# EAGLE board atxmega16d4.panel (EAGLE 7.3.0)
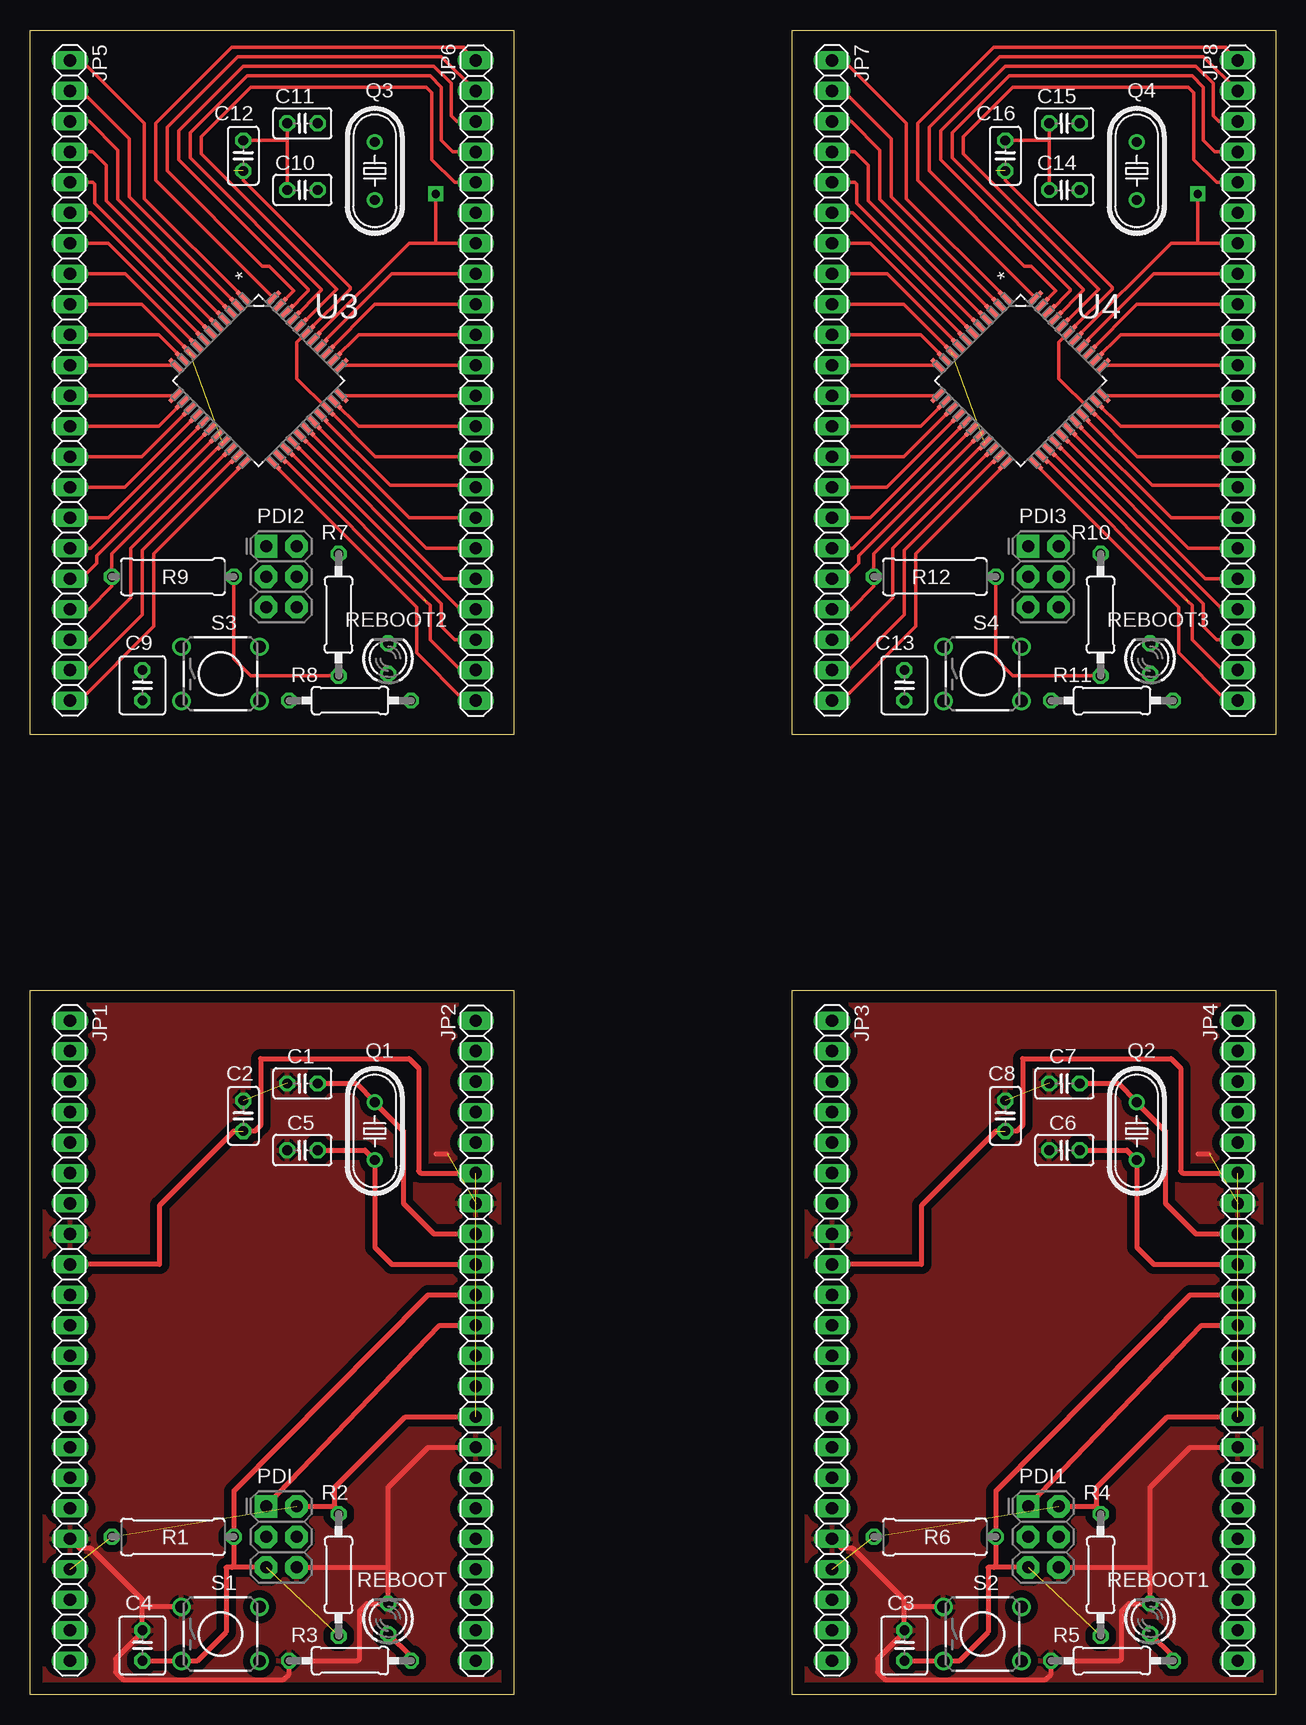
[diagram p0: board, top side]
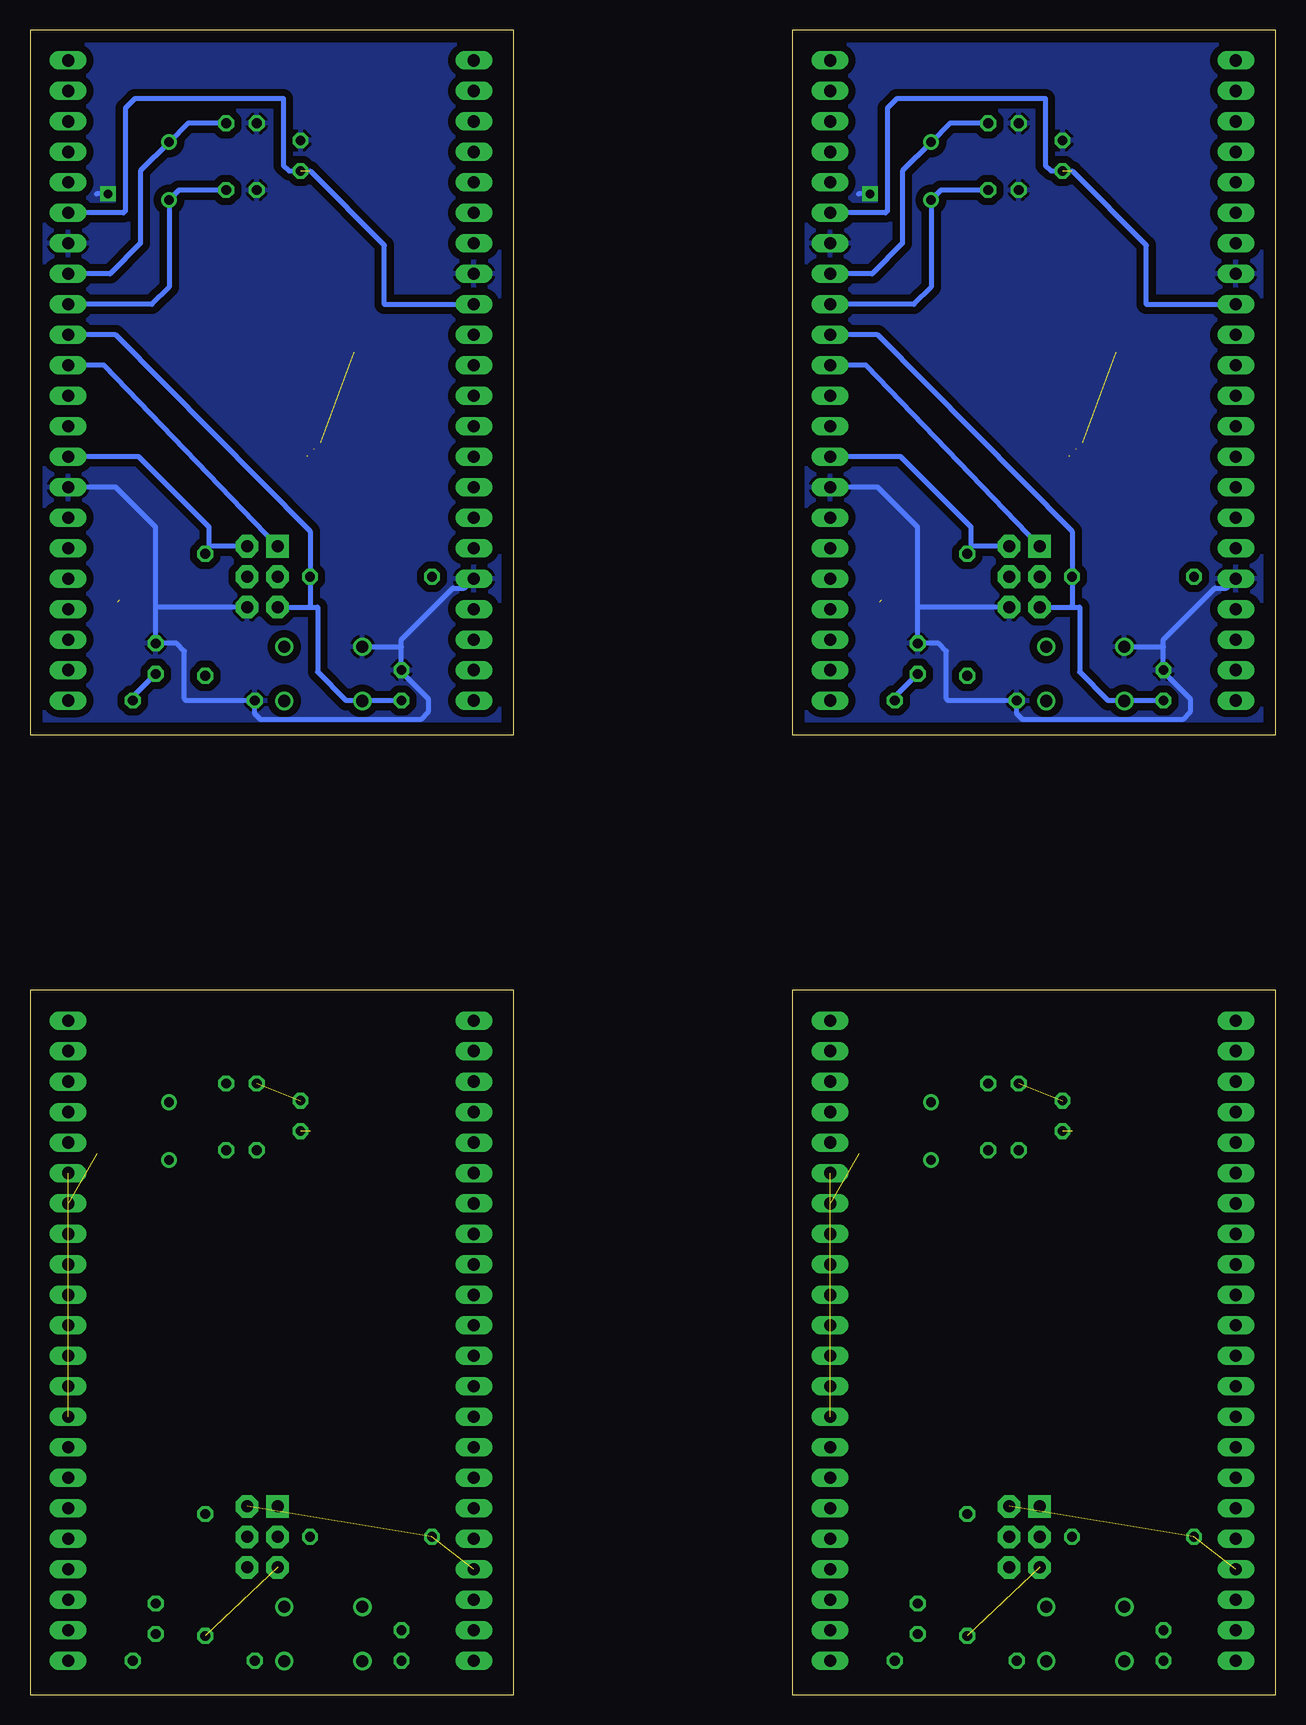
[diagram p1: board, bottom side, seen from below]

Size 103.82 x 138.75 mm. Coordinates in mm from the lower left corner, seen from the top.
Outline: 0,58.74 40.32,58.74 40.32,0 0,0 0,58.74
Outline: 63.5,58.74 103.82,58.74 103.82,0 63.5,0 63.5,58.74
Outline: 0,138.75 40.32,138.75 40.32,80.01 0,80.01 0,138.75
Outline: 63.5,138.75 103.82,138.75 103.82,80.01 63.5,80.01 63.5,138.75
Copper layers (1*16): Top 0.035mm / dielectric 1.5mm / Bottom 0.035mm
Design rules "default": minimum track width 10mil, minimum drill 24mil, track to track 8mil, track to pad 8mil, pad to pad 8mil, via to via 8mil, smd to smd 8mil, copper to edge 40mil, drill to drill 8mil, minimum pad ring 10mil, minimum via ring 8mil, stop-mask expansion 4mil, vias tented up to drill 0mil, thermal gap 10mil

## Footprints (pad centres in the part's own frame; a part is rotated, then mirrored left to right if it is on the bottom)
C025-025X050 = drill 0.813 octagon: 1 -1.27,0; 2 1.27,0
C025-040X050 = drill 0.813 octagon: 1 -1.27,0; 2 1.27,0
1X22 = drill 1.016 long: 1 -26.67,0; 2 -24.13,0; 3 -21.59,0; 4 -19.05,0; 5 -16.51,0; 6 -13.97,0; 7 -11.43,0; 8 -8.89,0; 9 -6.35,0; 10 -3.81,0; 11 -1.27,0; 12 1.27,0; 13 3.81,0; 14 6.35,0; 15 8.89,0; 16 11.43,0; 17 13.97,0; 18 16.51,0; 19 19.05,0; 20 21.59,0; 21 24.13,0; 22 26.67,0
2X3-NS = drill 1.016 pad 1.88 square: 1 -2.54,-1.27 | drill 1.016 pad 1.88 octagon: 2 -2.54,1.27; 3 0,-1.27; 4 0,1.27; 5 2.54,-1.27; 6 2.54,1.27
HC49U-V = drill 0.813: 1 -2.413,0; 2 2.413,0
0309/10 = drill 0.813 octagon: 1 -5.08,0; 2 5.08,0
0207/10 = drill 0.813 octagon: 1 -5.08,0; 2 5.08,0
LED3MM = drill 0.813 octagon: A -1.27,0; K 1.27,0
TACTILE-PTH = drill 1.016: 1 -3.251,2.261; 2 3.251,2.261; 3 -3.251,-2.261; 4 3.251,-2.261
QFP80P1200X1200X120-44N = smd 1.473 x 0.356: 1 -5.74,3.988; 2 -5.74,3.2; 3 -5.74,2.388; 4 -5.74,1.6; 5 -5.74,0.787; 6 -5.74,0; 7 -5.74,-0.787; 8 -5.74,-1.6; 9 -5.74,-2.388; 10 -5.74,-3.2; 11 -5.74,-3.988; 23 5.74,-3.988; 24 5.74,-3.2; 25 5.74,-2.388; 26 5.74,-1.6; 27 5.74,-0.787; 28 5.74,0; 29 5.74,0.787; 30 5.74,1.6; 31 5.74,2.388; 32 5.74,3.2; 33 5.74,3.988 | smd 0.356 x 1.473: 12 -3.988,-5.74; 13 -3.2,-5.74; 14 -2.388,-5.74; 15 -1.6,-5.74; 16 -0.787,-5.74; 17 0,-5.74; 18 0.787,-5.74; 19 1.6,-5.74; 20 2.388,-5.74; 21 3.2,-5.74; 22 3.988,-5.74; 34 3.988,5.74; 35 3.2,5.74; 36 2.388,5.74; 37 1.6,5.74; 38 0.787,5.74; 39 0,5.74; 40 -0.787,5.74; 41 -1.6,5.74; 42 -2.388,5.74; 43 -3.2,5.74; 44 -3.988,5.74

## Placement (x,y rotation side)
C1  [C025-025X050]  22.7,50.96 180 top
C2  [C025-025X050]  17.78,48.26 90 top
C3  [C025-040X050]  72.87,4.13 90 top
C4  [C025-040X050]  9.37,4.13 90 top
C5  [C025-025X050]  22.7,45.4 180 top
C6  [C025-025X050]  86.2,45.4 180 top
C7  [C025-025X050]  86.2,50.96 180 top
C8  [C025-025X050]  81.28,48.26 90 top
C9  [C025-040X050]  9.37,84.14 90 top
C10  [C025-025X050]  22.7,125.41 180 top
C11  [C025-025X050]  22.7,130.97 180 top
C12  [C025-025X050]  17.78,128.27 90 top
C13  [C025-040X050]  72.87,84.14 90 top
C14  [C025-025X050]  86.2,125.41 180 top
C15  [C025-025X050]  86.2,130.97 180 top
C16  [C025-025X050]  81.28,128.27 90 top
JP1  [1X22]  3.33,29.53 270 top
JP2  [1X22]  37.15,29.53 90 top
JP3  [1X22]  66.83,29.53 270 top
JP4  [1X22]  100.65,29.53 90 top
JP5  [1X22]  3.33,109.54 270 top
JP6  [1X22]  37.15,109.54 90 top
JP7  [1X22]  66.83,109.54 270 top
JP8  [1X22]  100.65,109.54 90 top
PDI  [2X3-NS]  20.95,13.18 270 top
PDI1  [2X3-NS]  84.45,13.18 270 top
PDI2  [2X3-NS]  20.95,93.19 270 top
PDI3  [2X3-NS]  84.45,93.19 270 top
Q1  [HC49U-V]  28.73,46.99 270 top
Q2  [HC49U-V]  92.23,46.99 270 top
Q3  [HC49U-V]  28.73,127 270 top
Q4  [HC49U-V]  92.23,127 270 top
R1  [0309/10]  11.91,13.18 180 top
R2  [0207/10]  25.72,10 90 top
R3  [0207/10]  26.67,2.86 0 top
R4  [0207/10]  89.22,10 90 top
R5  [0207/10]  90.17,2.86 0 top
R6  [0309/10]  75.41,13.18 180 top
R7  [0207/10]  25.72,90.01 90 top
R8  [0207/10]  26.67,82.87 0 top
R9  [0309/10]  11.91,93.19 180 top
R10  [0207/10]  89.22,90.01 90 top
R11  [0207/10]  90.17,82.87 0 top
R12  [0309/10]  75.41,93.19 180 top
REBOOT  [LED3MM]  29.84,6.35 90 top
REBOOT1  [LED3MM]  93.34,6.35 90 top
REBOOT2  [LED3MM]  29.84,86.36 90 top
REBOOT3  [LED3MM]  93.34,86.36 90 top
S1  [TACTILE-PTH]  15.88,5.08 0 top
S2  [TACTILE-PTH]  79.38,5.08 0 top
S3  [TACTILE-PTH]  15.88,85.09 0 top
S4  [TACTILE-PTH]  79.38,85.09 0 top
U3  ATXMEGA16D4-AU  [QFP80P1200X1200X120-44N]  19.05,109.54 315 top
U4  ATXMEGA16D4-AU  [QFP80P1200X1200X120-44N]  82.55,109.54 315 top

## Library data of the parts
C1-C16 R1-R12 = rcl
JP1-JP8 = pinhead
PDI PDI1-PDI3 = BattleDroids
Q1-Q4 = crystal; OC_FARNELL: 1666969; OC_NEWARK: unknown
REBOOT REBOOT1-REBOOT3 = led
S1-S4 = SparkFun
U3 U4 = atxmega16d4au; MPN: ATXMEGA16D4-AU; OC_FARNELL: 1748553; OC_NEWARK: 68T3906; PACKAGE: TQFP-44; SUPPLIER: ATMEL

## Nets
3.3V: C2.1 JP1.9 JP1.19 JP2.9 JP2.17 PDI.2 R1.2 R2.2
3.3V1: C8.1 JP3.9 JP3.19 JP4.9 JP4.17 PDI1.2 R4.2 R6.2
3.3V2: C12.1 JP5.9 JP5.19 JP6.9 JP6.17 PDI2.2 R7.2 R9.2 U3.9 U3.19 U3.31 U3.39
3.3V3: C16.1 JP7.9 JP7.19 JP8.9 JP8.17 PDI3.2 R10.2 R12.2 U4.9 U4.19 U4.31 U4.39
GND: C1.2 C2.2 C4.2 C5.2 JP1.8 JP1.18 JP2.8 JP2.16 PDI.6 R3.1 REBOOT.K S1.1
GND1: C3.2 C6.2 C7.2 C8.2 JP3.8 JP3.18 JP4.8 JP4.16 PDI1.6 R5.1 REBOOT1.K S2.1
GND2: C9.2 C10.2 C11.2 C12.2 JP5.8 JP5.18 JP6.8 JP6.16 PDI2.6 R8.1 REBOOT2.K S3.1 U3.8 U3.18 U3.30 U3.38
GND3: C13.2 C14.2 C15.2 C16.2 JP7.8 JP7.18 JP8.8 JP8.16 PDI3.6 R11.1 REBOOT3.K S4.1 U4.8 U4.18 U4.30 U4.38
N$1: R5.2 REBOOT1.A
N$2: R8.2 REBOOT2.A
N$3: R11.2 REBOOT3.A
N$32: R3.2 REBOOT.A
PA0: JP2.18
PA1: JP2.19
PA2: JP2.20
PA3: JP2.21
PA4: JP2.22
PA5: JP1.1
PA6: JP1.2
PA7: JP1.3
PA8: JP3.1
PA9: JP3.2
PA10: JP3.3
PA11: JP4.20
PA12: JP4.18
PA13: JP4.21
PA14: JP4.19
PA15: JP4.22
PA16: JP5.1 U3.1
PA17: JP5.2 U3.2
PA18: JP5.3 U3.3
PA19: JP6.20 U3.42
PA20: JP6.18 U3.40
PA21: JP6.21 U3.43
PA22: JP6.19 U3.41
PA23: JP6.22 U3.44
PA24: JP7.1 U4.1
PA25: JP7.2 U4.2
PA26: JP7.3 U4.3
PA27: JP8.20 U4.42
PA28: JP8.18 U4.40
PA29: JP8.21 U4.43
PA30: JP8.19 U4.41
PA31: JP8.22 U4.44
PB0: JP1.4
PB1: JP1.5
PB2: JP1.6
PB3: JP1.7
PB4: JP3.4
PB5: JP3.5
PB6: JP3.7
PB7: JP3.6
PB8: JP5.4 U3.4
PB9: JP5.5 U3.5
PB10: JP5.7 U3.7
PB11: JP5.6 U3.6
PB12: JP7.4 U4.4
PB13: JP7.5 U4.5
PB14: JP7.7 U4.7
PB15: JP7.6 U4.6
PC0: JP1.10
PC1: JP1.11
PC2: JP1.12
PC3: JP1.13
PC4: JP1.14
PC5: JP1.15
PC6: JP1.16
PC7: JP1.17
PC8: JP3.10
PC9: JP3.11
PC10: JP3.12
PC11: JP3.13
PC12: JP3.14
PC13: JP3.15
PC14: JP3.16
PC15: JP3.17
PC16: JP5.10 U3.10
PC17: JP5.11 U3.11
PC18: JP5.12 U3.12
PC19: JP5.13 U3.13
PC20: JP5.14 U3.14
PC21: JP5.15 U3.15
PC22: JP5.16 U3.16
PC23: JP5.17 U3.17
PC24: JP7.10 U4.10
PC25: JP7.11 U4.11
PC26: JP7.12 U4.12
PC27: JP7.13 U4.13
PC28: JP7.14 U4.14
PC29: JP7.15 U4.15
PC30: JP7.16 U4.16
PC31: JP7.17 U4.17
PD0: JP1.20
PD1: JP1.21
PD2: JP1.22
PD3: JP2.1
PD4: JP2.2
PD5: JP2.3
PD6: JP2.4
PD7: JP2.5
PD8: JP3.21
PD9: JP4.3
PD10: JP3.22
PD11: JP4.1
PD12: JP4.2
PD13: JP4.4
PD14: JP4.5
PD15: JP3.20
PD16: JP5.21 U3.21
PD17: JP6.3 U3.25
PD18: JP5.22 U3.22
PD19: JP6.1 U3.23
PD20: JP6.2 U3.24
PD21: JP6.4 U3.26
PD22: JP6.5 U3.27
PD23: JP5.20 U3.20
PD24: JP7.21 U4.21
PD25: JP8.3 U4.25
PD26: JP7.22 U4.22
PD27: JP8.1 U4.23
PD28: JP8.2 U4.24
PD29: JP8.4 U4.26
PD30: JP8.5 U4.27
PD31: JP7.20 U4.20
PDI: JP2.12 PDI.1
PDI1: JP4.12 PDI1.1
PDI2: JP6.12 PDI2.1 U3.34
PDI3: JP8.12 PDI3.1 U4.34
PE0: JP2.6
PE1: JP2.7
PE2: JP2.10
PE3: JP2.11
PE4: JP4.7
PE5: JP4.6
PE6: JP4.10
PE7: JP4.11
PE8: JP6.7 U3.29
PE9: JP6.6 U3.28
PE10: JP6.10 U3.32
PE11: JP6.11 U3.33
PE12: JP8.7 U4.29
PE13: JP8.6 U4.28
PE14: JP8.10 U4.32
PE15: JP8.11 U4.33
PR0: C5.1 JP2.14 Q1.2
PR1: C1.1 JP2.15 Q1.1
PR2: C6.1 JP4.14 Q2.2
PR3: C7.1 JP4.15 Q2.1
PR4: C10.1 JP6.14 Q3.2 U3.36
PR5: C11.1 JP6.15 Q3.1 U3.37
PR6: C14.1 JP8.14 Q4.2 U4.36
PR7: C15.1 JP8.15 Q4.1 U4.37
RESET: C4.1 JP2.13 PDI.5 R1.1 R2.1 S1.3
RESET1: C3.1 JP4.13 PDI1.5 R4.1 R6.1 S2.3
RESET2: C9.1 JP6.13 PDI2.5 R7.1 R9.1 S3.3 U3.35
RESET3: C13.1 JP8.13 PDI3.5 R10.1 R12.1 S4.3 U4.35

## Tracks (layer width: path | path; a pad name or v marks a point on that pad's centre or on a via)
3.3V  (4 unrouted)
  Top 0.406: JP2.9 31.27,23.18 25.4,17.3 25.4,15.72 | R2.2 25.4,15.72 | JP2.17 32.54,43.5 32.38,43.66 32.38,52.23 31.59,53.02 19.21,53.02 19.21,47.47 18.73,46.99 C2.1 | JP1.9 10.79,35.88 10.79,40.8 16.99,46.99 | PDI.2 25.4,15.72
3.3V1  (4 unrouted)
  Top 0.406: JP4.9 94.77,23.18 88.9,17.3 88.9,15.72 | R4.2 88.9,15.72 | JP4.17 96.04,43.5 95.89,43.66 95.89,52.23 95.09,53.02 82.71,53.02 82.71,47.47 82.23,46.99 C8.1 | JP3.9 74.3,35.88 74.3,40.8 80.49,46.99 | PDI1.2 88.9,15.72
3.3V2  (2 unrouted)
  Top 0.305: JP5.9 9.32,115.89 U3.9 | JP6.9 28.78,103.19 U3.31 24.75,107.17 22.23,109.7 22.23,112.71 U3.39 26.67,117.16 26.67,117.32 17.78,126.21 C12.1 | JP5.19 4.92,90.49 6.83,92.39 R9.2 6.83,95.09 16.08,104.35 U3.19
  Bottom 0.406: JP6.9 31.27,103.19 25.4,97.31 25.4,95.73 | R7.2 25.4,95.73 | JP6.17 32.54,123.51 32.38,123.67 32.38,132.24 31.59,133.03 19.21,133.03 19.21,127.48 18.73,127 C12.1 | JP5.9 10.79,115.89 10.79,120.81 16.99,127 | PDI2.2 25.4,95.73
3.3V3  (2 unrouted)
  Top 0.305: JP7.9 72.82,115.89 U4.9 | JP8.9 92.28,103.19 U4.31 88.25,107.17 85.72,109.7 85.72,112.71 U4.39 90.17,117.16 90.17,117.32 81.28,126.21 C16.1 | JP7.19 68.42,90.49 70.33,92.39 R12.2 70.33,95.09 79.58,104.35 U4.19
  Bottom 0.406: JP8.9 94.77,103.19 88.9,97.31 88.9,95.73 | R10.2 88.9,95.73 | JP8.17 96.04,123.51 95.89,123.67 95.89,132.24 95.09,133.03 82.71,133.03 82.71,127.48 82.23,127 C16.1 | JP7.9 74.3,115.89 74.3,120.81 80.49,127 | PDI3.2 88.9,95.73
GND  (2 unrouted)
  Top 0.406: PDI.6 29.84,10.64 | 29.84,10.64 REBOOT.K 28.1,7.62 27.46,6.99 27.46,3.02 27.3,2.86 R3.1 21.59,1.75 21.11,1.27 7.78,1.27 7.14,1.91 7.14,3.02 9.37,5.24 C4.2 9.37,7.3 | 29.84,10.64 29.84,17.3 33.18,20.64 JP2.8 | 9.37,7.3 9.37,7.94 5.08,12.22 4.13,12.22 JP1.18 | S1.1 9.4,7.34 9.37,7.3 | 33.81,45.09 34.77,45.09
  pour Top (isolate 0.61): 0.32,58.42 40.01,58.42 40.01,0.32 0.32,0.32
GND1  (2 unrouted)
  Top 0.406: PDI1.6 93.34,10.64 | 93.34,10.64 REBOOT1.K 91.6,7.62 90.96,6.99 90.96,3.02 90.81,2.86 R5.1 85.09,1.75 84.61,1.27 71.28,1.27 70.64,1.91 70.64,3.02 72.87,5.24 C3.2 72.87,7.3 | 93.34,10.64 93.34,17.3 96.68,20.64 JP4.8 | 72.87,7.3 72.87,7.94 68.58,12.22 67.63,12.22 JP3.18 | S2.1 72.9,7.34 72.87,7.3 | 97.31,45.09 98.27,45.09
  pour Top (isolate 0.61): 63.82,58.42 103.5,58.42 103.5,0.32 63.82,0.32
GND2  (via drill 0.7 pad 1.27)
  Top 0.305: U3.38 31.59,120.97 33.81,120.97 | JP5.18 4.29,93.03 5.56,94.3 5.56,94.93 U3.18 | C12.2 21.43,129.54 | 21.43,129.54 C11.2 | C10.2 21.43,129.54 | U3.8 13.86,112.51 7.94,118.43 JP5.8 | U3.30 24.24,106.57 30,100.81 36.99,100.81 | 33.81,120.97 v33.81,125.1 | JP6.16 33.81,120.97
  Top 0.406: U3.38 | 36.99,100.81 JP6.8
  Bottom 0.406: PDI2.6 29.84,90.65 | 29.84,90.65 REBOOT2.K 28.1,87.63 27.46,87 27.46,83.03 27.3,82.87 R8.1 21.59,81.76 21.11,81.28 7.78,81.28 7.14,81.92 7.14,83.03 9.37,85.25 C9.2 9.37,87.31 | 29.84,90.65 29.84,97.31 33.18,100.65 JP6.8 | 9.37,87.31 9.37,87.95 5.08,92.23 4.13,92.23 JP5.18 | S3.1 9.4,87.35 9.37,87.31 | v33.81,125.1 34.77,125.1
  pour Bottom (isolate 0.61): 0.32,138.43 40.01,138.43 40.01,80.33 0.32,80.33
GND3  (via drill 0.7 pad 1.27)
  Top 0.305: U4.38 95.09,120.97 97.31,120.97 | JP7.18 67.79,93.03 69.06,94.3 69.06,94.93 U4.18 | C16.2 84.93,129.54 | 84.93,129.54 C15.2 | C14.2 84.93,129.54 | U4.8 77.36,112.51 71.44,118.43 JP7.8 | U4.30 87.74,106.57 93.5,100.81 100.49,100.81 | 97.31,120.97 v97.31,125.1 | JP8.16 97.31,120.97
  Top 0.406: U4.38 | 100.49,100.81 JP8.8
  Bottom 0.406: PDI3.6 93.34,90.65 | 93.34,90.65 REBOOT3.K 91.6,87.63 90.96,87 90.96,83.03 90.81,82.87 R11.1 85.09,81.76 84.61,81.28 71.28,81.28 70.64,81.92 70.64,83.03 72.87,85.25 C13.2 72.87,87.31 | 93.34,90.65 93.34,97.31 96.68,100.65 JP8.8 | 72.87,87.31 72.87,87.95 68.58,92.23 67.63,92.23 JP7.18 | S4.1 72.9,87.35 72.87,87.31 | v97.31,125.1 98.27,125.1
  pour Bottom (isolate 0.61): 63.82,138.43 103.5,138.43 103.5,80.33 63.82,80.33
N$1
  Top 0.406: R5.2 95.25,3.18 REBOOT1.A
N$2
  Bottom 0.406: R8.2 31.75,83.19 REBOOT2.A
N$3
  Bottom 0.406: R11.2 95.25,83.19 REBOOT3.A
N$32
  Top 0.406: R3.2 31.75,3.18 REBOOT.A
PA16
  Top 0.305: JP5.1 4.29,136.21 9.53,130.97 9.53,124.7 U3.1
PA17
  Top 0.305: JP5.2 4.29,133.67 8.26,129.7 8.26,124.86 U3.2
PA18
  Top 0.305: JP5.3 4.92,131.13 7.3,128.75 7.3,124.66 U3.3
PA19
  Top 0.305: U3.42 21.46,115.29 23.18,117 23.18,117.16 12.38,127.95 12.38,130.33 17.78,135.73 33.66,135.73 35.08,134.3 35.08,131.6 35.56,131.13 JP6.20
PA20
  Top 0.305: U3.40 25.56,117.16 14.29,128.43 14.29,129.86 18.41,133.99 33.02,133.99 33.5,133.51 33.5,127.95 35.4,126.05 JP6.18
  Top 0.406: U3.40
PA21
  Top 0.305: U3.43 21.98,117 19.92,119.06 19.37,119.06 11.43,127 11.43,130.65 17.3,136.53 34.29,136.53 JP6.21
PA22
  Top 0.305: JP6.19 35.24,128.59 34.29,129.54 34.29,133.99 33.34,134.94 18.1,134.94 13.34,130.18 13.34,128.11 24.29,117.16 24.29,117.04 U3.41
PA23
  Top 0.305: U3.44 10.48,126.23 10.48,130.97 16.83,137.32 36.2,137.32 36.2,137.16 JP6.22
PA24
  Top 0.305: JP7.1 67.79,136.21 73.03,130.97 73.03,124.7 U4.1
PA25
  Top 0.305: JP7.2 67.79,133.67 71.75,129.7 71.75,124.86 U4.2
PA26
  Top 0.305: JP7.3 68.42,131.13 70.8,128.75 70.8,124.66 U4.3
PA27
  Top 0.305: U4.42 84.96,115.29 86.68,117 86.68,117.16 75.88,127.95 75.88,130.33 81.28,135.73 97.16,135.73 98.58,134.3 98.58,131.6 99.06,131.13 JP8.20
PA28
  Top 0.305: U4.40 89.06,117.16 77.79,128.43 77.79,129.86 81.92,133.99 96.52,133.99 97,133.51 97,127.95 98.9,126.05 JP8.18
  Top 0.406: U4.40
PA29
  Top 0.305: U4.43 85.48,117 83.42,119.06 82.87,119.06 74.93,127 74.93,130.65 80.8,136.53 97.79,136.53 JP8.21
PA30
  Top 0.305: JP8.19 98.74,128.59 97.79,129.54 97.79,133.99 96.84,134.94 81.6,134.94 76.83,130.18 76.83,128.11 87.79,117.16 87.79,117.04 U4.41
PA31
  Top 0.305: U4.44 73.98,126.23 73.98,130.97 80.33,137.32 99.69,137.32 99.69,137.16 JP8.22
PB8
  Top 0.305: JP5.4 5.24,128.59 6.35,127.48 6.35,124.5 U3.4
PB9
  Top 0.305: U3.5 5.4,124.3 5.4,125.89 5.24,126.05 JP5.5
PB10
  Top 0.305: JP5.7 6.51,120.97 U3.7
PB11
  Top 0.305: U3.6 5.08,123.51 JP5.6
PB12
  Top 0.305: JP7.4 68.74,128.59 69.85,127.48 69.85,124.5 U4.4
PB13
  Top 0.305: U4.5 68.9,124.3 68.9,125.89 68.74,126.05 JP7.5
PB14
  Top 0.305: JP7.7 70.01,120.97 U4.7
PB15
  Top 0.305: U4.6 68.58,123.51 JP7.6
PC16
  Top 0.305: JP5.10 10.71,113.35 U3.10
PC17
  Top 0.305: JP5.11 12.14,110.81
  Top 0.406: 12.14,110.81 U3.11
PC18
  Top 0.305: JP5.12 12.14,108.27
  Top 0.406: 12.14,108.27 U3.12
PC19
  Top 0.305: JP5.13 10.71,105.73 U3.13
PC20
  Top 0.305: JP5.14 9.32,103.19 U3.14
PC21
  Top 0.305: U3.15 7.9,100.65 JP5.15
PC22
  Top 0.305: U3.16 6.51,98.11 JP5.16
PC23
  Top 0.305: U3.17 5.08,95.57 JP5.17
PC24
  Top 0.305: JP7.10 74.21,113.35 U4.10
PC25
  Top 0.305: JP7.11 75.64,110.81
  Top 0.406: 75.64,110.81 U4.11
PC26
  Top 0.305: JP7.12 75.64,108.27
  Top 0.406: 75.64,108.27 U4.12
PC27
  Top 0.305: JP7.13 74.21,105.73 U4.13
PC28
  Top 0.305: JP7.14 72.82,103.19 U4.14
PC29
  Top 0.305: U4.15 71.4,100.65 JP7.15
PC30
  Top 0.305: U4.16 70.01,98.11 JP7.16
PC31
  Top 0.305: U4.17 68.58,95.57 JP7.17
PD16  (1 unrouted)
  Top 0.305: 17.17,103.22 9.37,95.41 9.37,90.01 4.6,85.25 3.49,85.25 JP5.21
PD17
  Top 0.305: JP6.3 35.4,87.95 34.29,89.06 34.29,90.92 U3.25
PD18
  Top 0.305: U3.22 17.81,102.58 10.32,95.09 10.32,89.06 4.13,82.87 JP5.22
PD19
  Top 0.305: JP6.1 36.2,82.87 32.23,86.84 32.23,90.65 20.29,102.58 U3.23
PD20  (1 unrouted)
  Top 0.305: JP6.2 35.88,85.41 33.34,87.95 33.34,90.81 33.02,91.12 | U3.24 20.93,103.22 32.86,91.28
PD21
  Top 0.305: JP6.4 35.84,90.49 U3.26
PD22
  Top 0.305: JP6.5 34.45,93.03 U3.27
PD23  (1 unrouted)
  Top 0.305: 16.64,103.79 8.41,95.57 8.41,91.44 4.92,87.95 JP5.20
PD24  (1 unrouted)
  Top 0.305: 80.67,103.22 72.87,95.41 72.87,90.01 68.1,85.25 66.99,85.25 JP7.21
PD25
  Top 0.305: JP8.3 98.9,87.95 97.79,89.06 97.79,90.92 U4.25
PD26
  Top 0.305: U4.22 81.31,102.58 73.82,95.09 73.82,89.06 67.63,82.87 JP7.22
PD27
  Top 0.305: JP8.1 99.69,82.87 95.73,86.84 95.73,90.65 83.79,102.58 U4.23
PD28  (1 unrouted)
  Top 0.305: JP8.2 99.38,85.41 96.84,87.95 96.84,90.81 96.52,91.12 | U4.24 84.43,103.22 96.36,91.28
PD29
  Top 0.305: JP8.4 99.34,90.49 U4.26
PD30
  Top 0.305: JP8.5 97.95,93.03 U4.27
PD31  (1 unrouted)
  Top 0.305: 80.14,103.79 71.91,95.57 71.91,91.44 68.42,87.95 JP7.20
PDI
  Top 0.406: PDI.1 34.13,30.8 JP2.12
PDI1
  Top 0.406: PDI1.1 97.63,30.8 JP4.12
PDI2
  Top 0.305: JP6.12 25.96,110.81
  Top 0.406: 25.96,110.81 U3.34
  Bottom 0.406: PDI2.1 34.13,110.81 JP6.12
PDI3
  Top 0.305: JP8.12 89.46,110.81
  Top 0.406: 89.46,110.81 U4.34
  Bottom 0.406: PDI3.1 97.63,110.81 JP8.12
PE8
  Top 0.305: JP6.7 31.59,98.11 U3.29
PE9
  Top 0.305: JP6.6 33.02,95.57 U3.28
PE10
  Top 0.305: JP6.10 27.39,105.73 U3.32
PE11
  Top 0.305: JP6.11 25.96,108.27
  Top 0.406: 25.96,108.27 U3.33
PE12
  Top 0.305: JP8.7 95.09,98.11 U4.29
PE13
  Top 0.305: JP8.6 96.52,95.57 U4.28
PE14
  Top 0.305: JP8.10 90.89,105.73 U4.32
PE15
  Top 0.305: JP8.11 89.46,108.27
  Top 0.406: 89.46,108.27 U4.33
PR0
  Top 0.406: JP2.14 30.16,35.88 28.73,37.31 Q1.2 27.91,45.4 C5.1
PR1
  Top 0.406: JP2.15 33.66,38.42 31.11,40.96 31.11,46.99 28.73,49.37 Q1.1 27.18,50.96 C1.1
PR2
  Top 0.406: JP4.14 93.66,35.88 92.23,37.31 Q2.2 91.41,45.4 C6.1
PR3
  Top 0.406: JP4.15 97.16,38.42 94.61,40.96 94.61,46.99 92.23,49.37 Q2.1 90.68,50.96 C7.1
PR4
  Top 0.305: U3.36 24.8,111.95 28.73,115.89 JP6.14
  Bottom 0.406: JP6.14 30.16,115.89 28.73,117.32 Q3.2 27.91,125.41 C10.1
PR5
  Top 0.305: U3.37 24.24,112.51 30.16,118.43 JP6.15
  Bottom 0.406: JP6.15 33.66,118.43 31.11,120.97 31.11,127 28.73,129.38 Q3.1 27.18,130.97 C11.1
PR6
  Top 0.305: U4.36 88.3,111.95 92.23,115.89 JP8.14
  Bottom 0.406: JP8.14 93.66,115.89 92.23,117.32 Q4.2 91.41,125.41 C14.1
PR7
  Top 0.305: U4.37 87.74,112.51 93.66,118.43 JP8.15
  Bottom 0.406: JP8.15 97.16,118.43 94.61,120.97 94.61,127 92.23,129.38 Q4.1 90.68,130.97 C15.1
RESET  (1 unrouted)
  Top 0.406: JP2.13 33.18,33.34 16.99,16.99 R1.1 16.99,10.8 16.83,10.64 | C4.1 12.59,2.86 S1.3 12.66,2.86 13.97,2.86 16.35,5.24 16.35,10.64 16.83,10.64 | PDI.5 16.83,10.64
RESET1  (1 unrouted)
  Top 0.406: JP4.13 96.68,33.34 80.49,16.99 R6.1 80.49,10.8 80.33,10.64 | C3.1 76.09,2.86 S2.3 76.16,2.86 77.47,2.86 79.85,5.24 79.85,10.64 80.33,10.64 | PDI1.5 80.33,10.64
RESET2
  Top 0.305: JP6.13 27.39,113.35 U3.35 | R9.1 16.99,86.36 18.41,84.93 R7.1
  Bottom 0.406: JP6.13 33.18,113.35 16.99,97 R9.1 16.99,90.81 16.83,90.65 | C9.1 12.59,82.87 S3.3 12.66,82.87 13.97,82.87 16.35,85.25 16.35,90.65 16.83,90.65 | PDI2.5 16.83,90.65
RESET3
  Top 0.305: JP8.13 90.89,113.35 U4.35 | R12.1 80.49,86.36 81.92,84.93 R10.1
  Bottom 0.406: JP8.13 96.68,113.35 80.49,97 R12.1 80.49,90.81 80.33,90.65 | C13.1 76.09,82.87 S4.3 76.16,82.87 77.47,82.87 79.85,85.25 79.85,90.65 80.33,90.65 | PDI3.5 80.33,90.65